# Altium PCB PCB1chinh_thuc_2.PcbDoc
Units mm, origin at the board's own origin, x right, y up, seen from the top; angles counter-clockwise.
Board outline 152.4 x 101.6 mm, 2 copper layers (Top Layer, Bottom Layer); 31 components, 21 nets, 118 pads, 0 vias.
Unrouted connection lines stored in the file: 1.
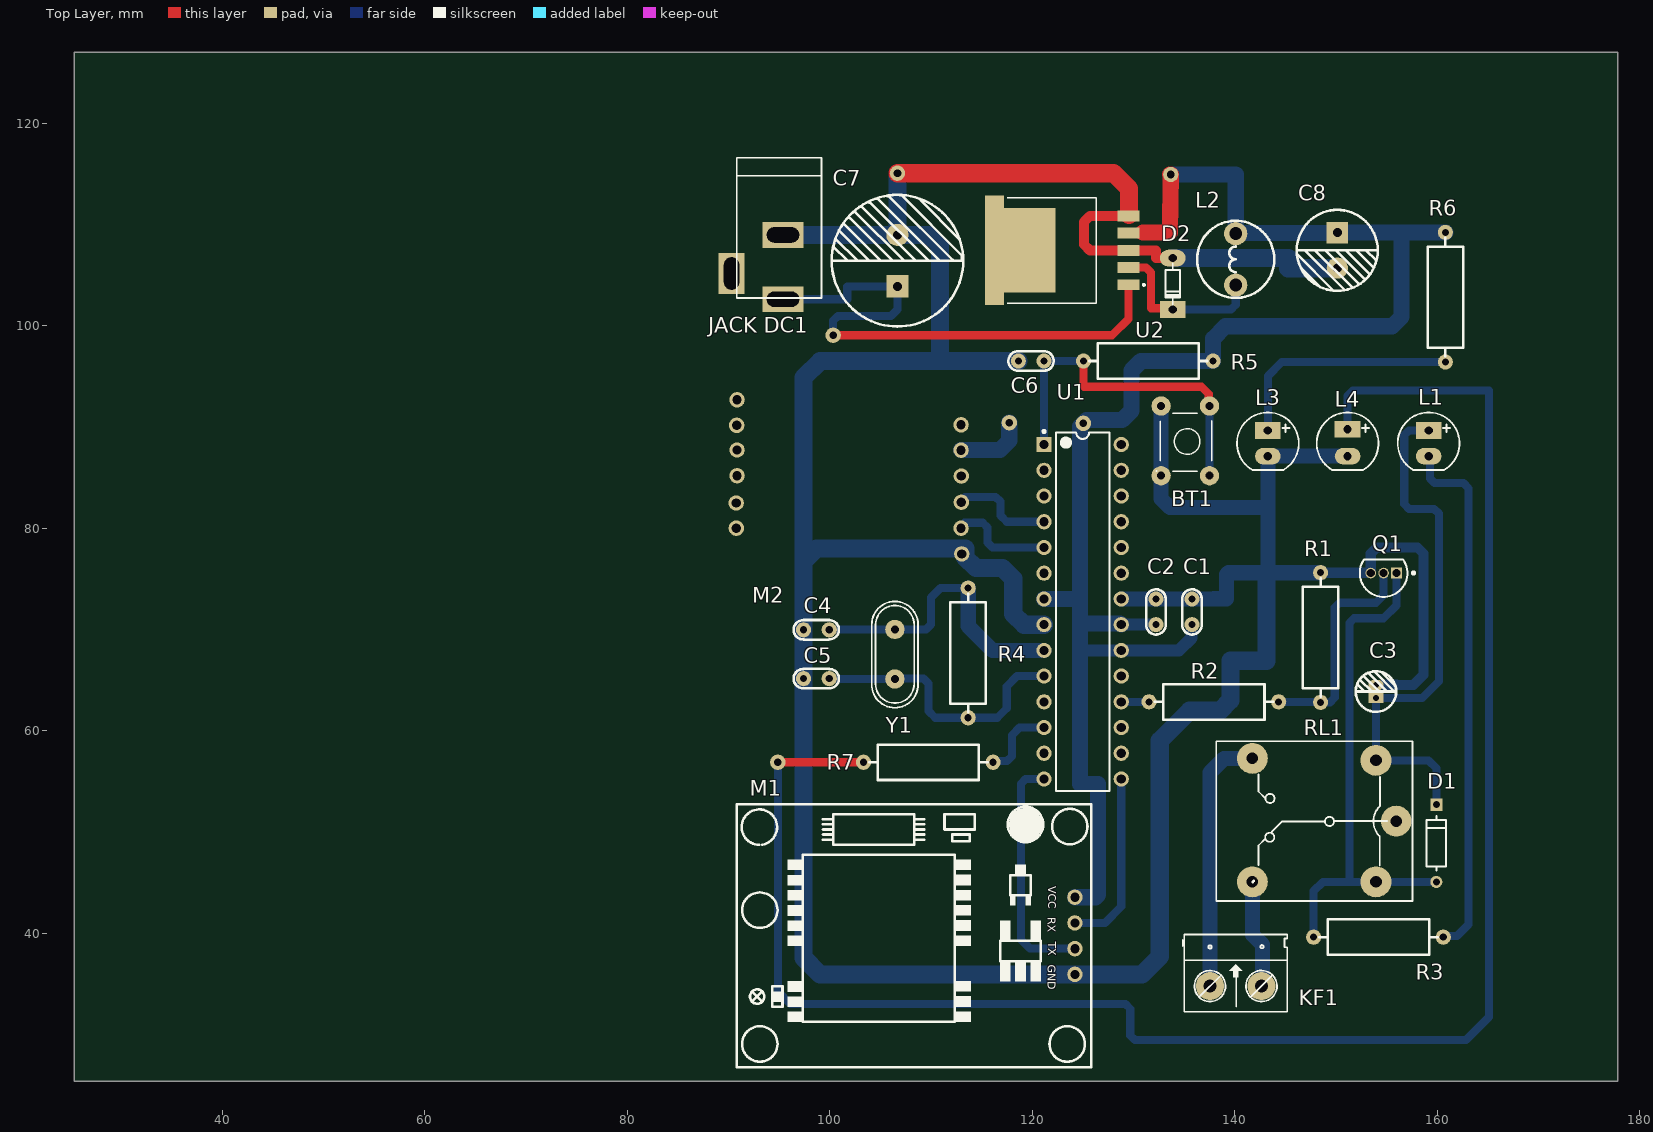
[diagram p0: Top Layer view]
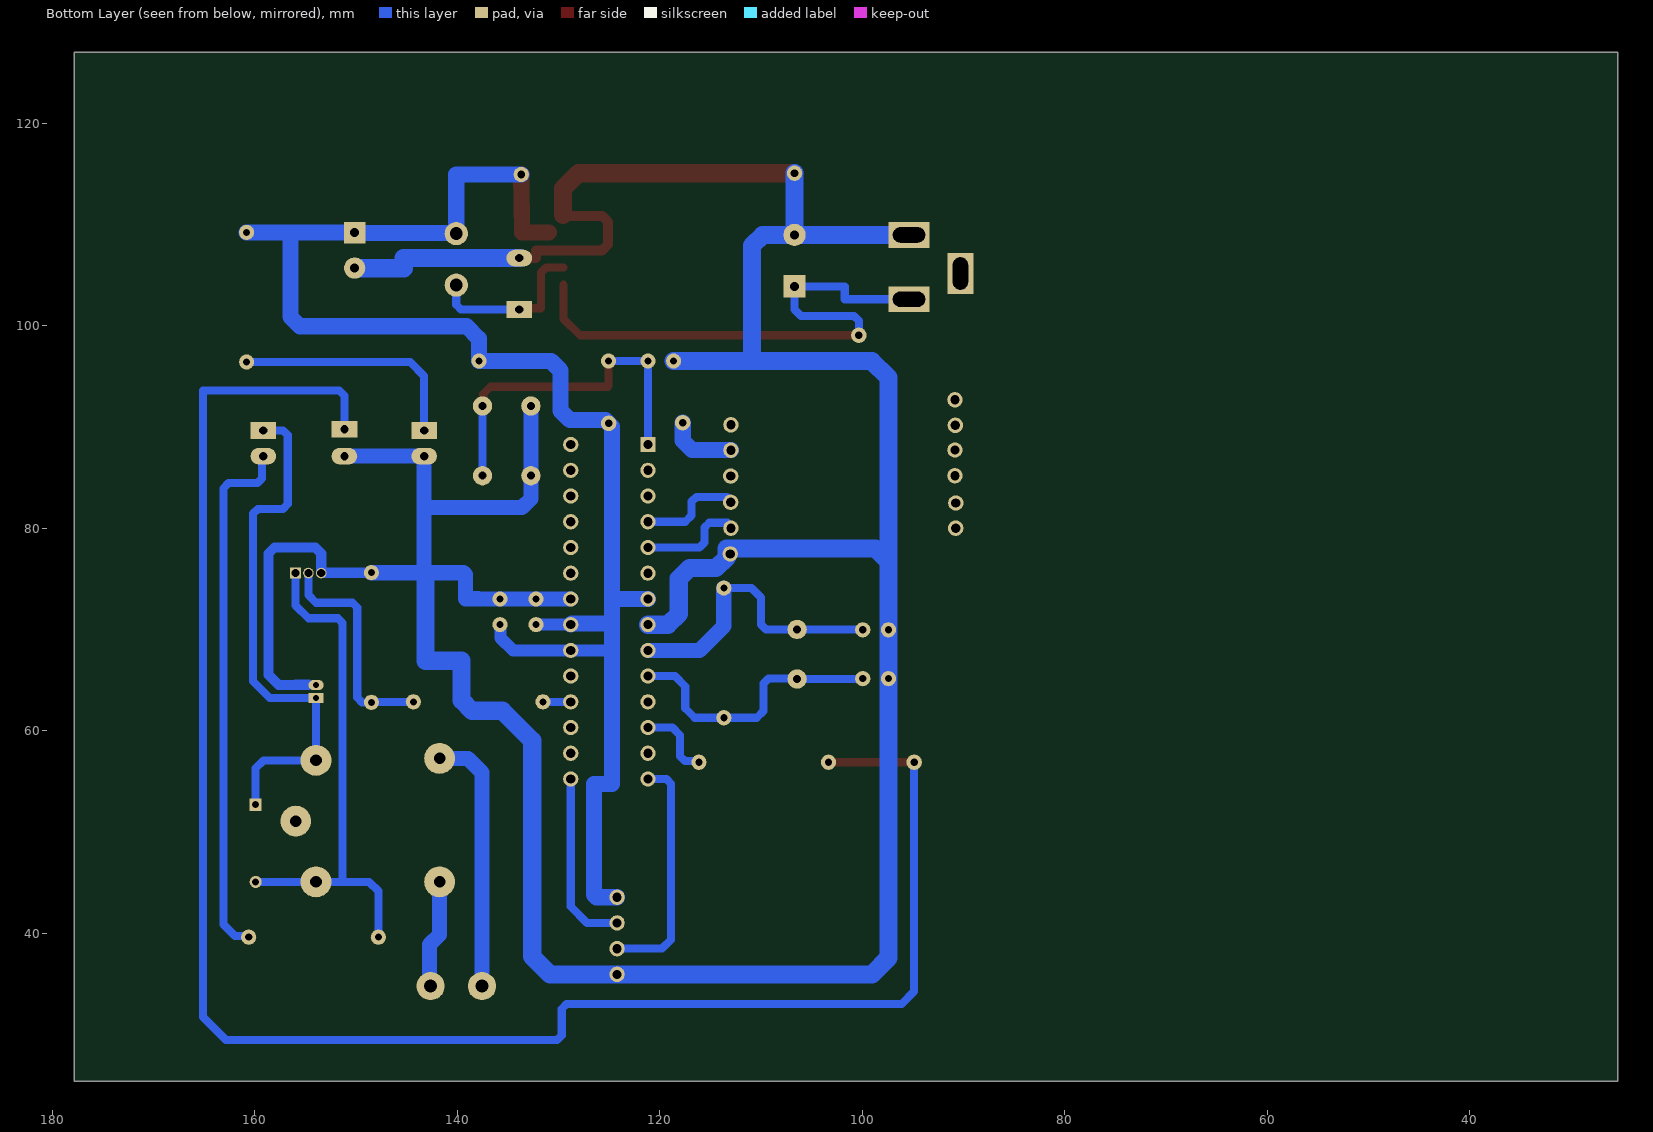
[diagram p1: Bottom Layer view, seen from below]
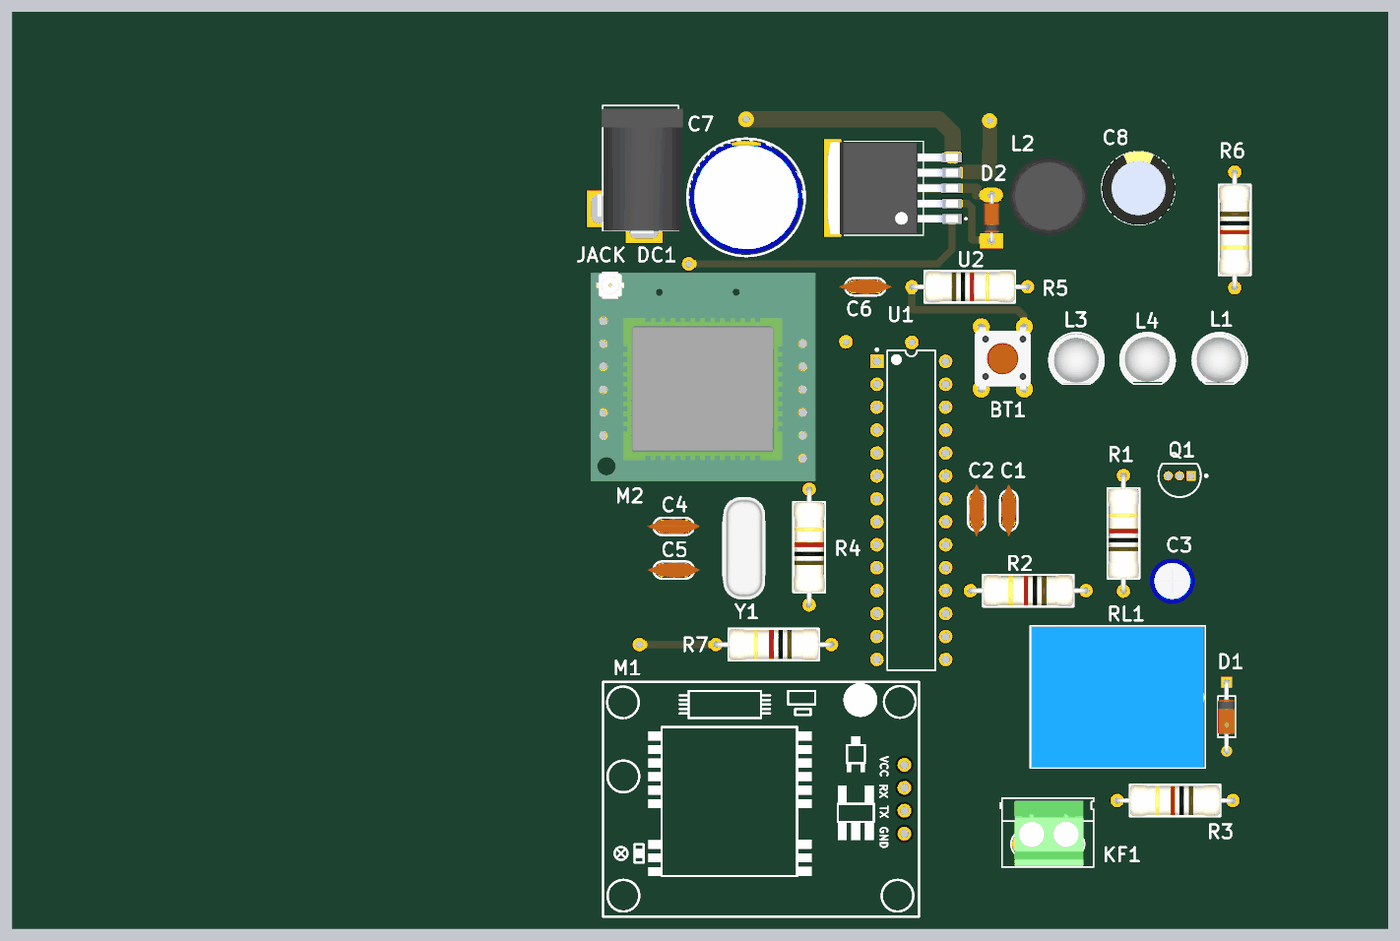
[diagram p2: 3D render of the assembled board from above, using the file's embedded part models]

## Layer stack, top to bottom
Top Solder: solder mask 0.0102, Solder Resist, Dk 3.5
Top Layer: signal copper 0.0356
Dielectric 1: dielectric 0.32, FR-4, Dk 4.8
Bottom Layer: signal copper 0.0356
Bottom Solder: solder mask 0.0102, Solder Resist, Dk 3.5

## Board outline
25.4,25.4 177.8,25.4 177.8,127 25.4,127

## Design rules (kind name [scope] priority, off if disabled: settings)
Clearance [All] p1: gap=0.3 ignorepadtopadclearanceinfootprint=FALSE
PolygonConnect [All] p1: connectstyle=Relief reliefconductorwidth=0.254 reliefentries=4 polygonreliefangle="90 Angle" airgapwidth=0.254
RoutingVias [All] p1: holewidth=0.711 width=1.27 viastyle="Through Hole" minholewidth=0.711 minwidth=1.27 maxholewidth=0.711 maxwidth=1.27
SolderMaskExpansion [All] p1: expansion=0.102 istentingtop=FALSE
SupplyNets "Schematic Supply Nets_1" [InNet('+3.3V')] p1: voltage=0.000
SupplyNets "Schematic Supply Nets" [InNet('GND')] p2: voltage=0.000
Width 3.3V [InNet('+3.3V')] p1: maxlimit=1.6 minlimit=0.5 preferedwidth=1.2
Width GND [InNet('GND')] p2: maxlimit=1.8 minlimit=1 preferedwidth=1.5
Width [All] p3: maxlimit=1.5 minlimit=0.5 preferedwidth=0.8
30 further rules are at their usual default settings.

## Components (designator, comment, footprint, x,y, rotation, side; value= is the part's Value field where it differs from the comment)
BT1 "Nut Nhan 4 Chan Cam 6x6" "Nut Nhan 4 Chan Cam 6x6" 137.693,91.745 r270 top
C1 "104" "tu gom" 135.763,71.755 r90 top
C2 "104" "tu gom" 132.207,71.755 r90 top
C3 "10uF" "tu hoa 4mm" 153.924,63.881 r90 top
C4 "22pF" "tu gom" 98.679,69.977 r0 top
C5 "22pF" "tu gom" 98.679,65.151 r0 top
C6 "104" "tu gom" 119.888,96.52 r0 top
C7 "680uF" "tu hoa 13mm" 106.68,106.426 r90 top
C8 "220uF" "Tu hoa 8mm" 150.114,107.442 r270 top
D1 "1N4148" FP-017AG-MFG 159.893,48.895 r270 top
D2 "1N5824" "DIODE 0.5A" 133.858,104.14 r90 top
"JACK DC1" "JACK DC 5.5" "JACK DC 5.5" 92.837,105.791 r270 top value="Jac DC"
KF1 "CON 2 KF301" "Con 2 KF301 5.08" 137.541,34.798 r0 top
L1 "LED 5mm" LED-5MM-Yellow 159.131,89.662 r270 top
L2 "0912 - 33uH - 2A" "CUON CAM 100uH3A" 140.081,106.553 r90 top
L3 "LED 5mm" LED-5MM-RED 143.256,89.662 r270 top
L4 "LED 5mm" LED-5MM-Green 151.13,89.662 r270 top
M1 "GPS NEO 6M" PCBComponent_1#1 108.331,39.243 r270 top
M2 "SIM A7680C" PCBComponent_1#2 101.765,81.633 r0 top
Q1 "BC547B" ONSC-TO-92-3-29-11 154.682,75.579 r180 top
R1 "10k" "tro vach 1/2w" 148.463,69.215 r90 top
R2 "1k" "tro vach 1/2w" 137.922,62.865 r180 top
R3 "200" "tro vach 1/2w" 154.178,39.624 r180 top
R4 "1M" "tro vach 1/2w" 113.665,67.691 r90 top
R5 "10k" "tro vach 1/2w" 131.445,96.52 r0 top
R6 "1k" "tro vach 1/2w" 160.782,102.82 r270 top
R7 "1k" "tro vach 1/2w" 109.728,56.896 r180 top
RL1 "Relay" "Relay 5 Chan SRD" 155.932,51.085 r180 top
U1 "ATmega328-PU" 28P3 124.968,71.755 r0 top
U2 "LM2596S-3.3" VREG_LM2596S-3.3 122.936,107.442 r180 top
Y1 "16Mhz" "Thach Anh 2 chan cam" 106.426,67.564 r90 top value=4Mhz

## Footprints (in the part's own frame and the unit in brackets; to place one, negate y for a bottom-side part, rotate by r counter-clockwise, add the part's x,y. Pads: shape width x height; smd on the part's side, far side on the other; paste and mask are expansions set on the pad)
28P3 [mm] "28-Pin Plastic Dual In-Line Package (PDIP)"
  rect 1.5x1.5 hole 0.9: 1(-3.81,16.51)
  round 1.5 hole 0.9: 2(-3.81,13.97) 3(-3.81,11.43) 4(-3.81,8.89) 5(-3.81,6.35) 6(-3.81,3.81) 7(-3.81,1.27) 8(-3.81,-1.27) 9(-3.81,-3.81) 10(-3.81,-6.35) 11(-3.81,-8.89) 12(-3.81,-11.43) 13(-3.81,-13.97) 14(-3.81,-16.51) 15(3.81,-16.51) 16(3.81,-13.97) 17(3.81,-11.43) 18(3.81,-8.89) 19(3.81,-6.35) 20(3.81,-3.81) 21(3.81,-1.27) 22(3.81,1.27) 23(3.81,3.81) 24(3.81,6.35) 25(3.81,8.89) 26(3.81,11.43) 27(3.81,13.97) 28(3.81,16.51)
  silkscreen extent -3.93,-17.7 2.65,17.93, body extent -3.6,-17.65 3.6,17.65, height 4.58
"Con 2 KF301 5.08" [mil]
  round 110 hole 50: 1(0,0) 2(200,0)
  silkscreen extent -106,-100 300,200, body extent -45,-97 255,190, height 335
"CUON CAM 100uH3A" [mil] "100uH3A"
  round 90 hole 50: 1(-100,0) 2(100,0)
  silkscreen extent -150,-150 150,150, body extent -171,-175 171,167, height 394
"DIODE 0.5A" [mil] "Diode muoi, xung"
  oval 65x100 hole 32: 1(100,0)
  rect 65x100 hole 32: 2(-100,0)
  silkscreen extent -80,-30 80,28, body extent -108,-33 108,32, height 61
FP-017AG-MFG [mm]
  rect 1.2x1.2 hole 0.7 paste-2539.97 mask+0: 1(-3.813,0)
  round 1.2 hole 0.7 paste-2539.97 mask+0: 2(3.813,0)
  silkscreen extent -2.68,-0.95 2.68,0.95, body extent -4.51,-1.05 4.51,1.05, height 0.25
"JACK DC 5.5" [mm] "Jac DC input"
  rect 2.54x4.064 hole 1.5 slot 3.2 at 90 deg: 1(3.175,2.54) 2(-3.175,2.54)
  rect 4.064x2.54 hole 1.5 slot 3.2 at 0 deg: 3(0.635,-2.54)
  silkscreen extent -10.8,-2.03 3.05,6.35, body extent -10.42,-2.67 3.4,6.84, height 11.02
LED-5MM-Green [mil] "LED 2 PIN, 5 ly , Only colour,pin to pin 100mil"
  rect 65x100 hole 32: 1(-5,0)
  oval 65x100 hole 32: 2(100,0)
  silkscreen extent -70,-120 154,120, body extent -69,-120 145,117, height 339
LED-5MM-RED [mil] "LED 2 PIN, 5 ly , Only colour,pin to pin 100mil"
  rect 65x100 hole 32: 1(0,0)
  oval 65x100 hole 32: 2(100,0)
  silkscreen extent -70,-120 154,120, body extent -65,-119 149,118, height 339
LED-5MM-Yellow [mil] "LED 2 PIN, 5 ly , Only colour,pin to pin 100mil"
  rect 65x100 hole 32: 1(0,0)
  oval 65x100 hole 32: 2(100,0)
  silkscreen extent -70,-120 154,120, body extent -67,-122 147,115, height 339
"Nut Nhan 4 Chan Cam 6x6" [mil] "SW button 4pin, 250 x250 mil"
  round 75 hole 31: 1(-13,-8) 1(258,-8) 2(-13,-196) 2(258,-196)
  silkscreen extent 15,-215 240,0, body extent -31,-225 281,19, height 276
ONSC-TO-92-3-29-11 [mm] "TO, 3-Leads, Body Dia 4.7mm, Pitch 1.27mm"
  rect 1.05x1.05 hole 0.8: 1(-1.27,0)
  round 1.05 hole 0.8: 2(0,0) 3(1.27,0)
  silkscreen extent -3.08,-1.34 2.35,2.35, body extent -2.35,-1.33 2.36,2.36, height 7.87
PCBComponent_1#1 [mil]
  round 60 hole 36 paste-99999 mask+10: 1(-170.37,624.88) 2(-70.37,624.88) 3(29.63,624.88) 4(129.63,624.88)
  silkscreen extent -532,-689 491,689
PCBComponent_1#2 [mil]
  round 60 hole 36 paste-99999 mask+10: 1(-430,435) 2(-431.44,335.84) 3(-430,240) 4(-430,140) 5(-433.54,33.94) 6(-432.84,-63.82) 7(440.9,337.96) 8(440.9,239.49) 9(442.03,138.77) 10(442.03,36.9) 11(440.9,-63.82) 12(443.49,-163.9)
  body extent -485,-262 496,652, height 167
"Relay 5 Chan SRD" [mil] "Relay SPDT, 5 pin, 10A,W 650mil, L 800mil, H 800mil"
  round 120 hole 45: 1(0,0) 2(559.06,236.22) 3(559.06,-243.78) 4(78.74,-236.22) 5(78.74,236.22)
  silkscreen extent -63,-311 700,310, body extent -55,-306 697,304, height 602
"Thach Anh 2 chan cam" [mm]
  round 1.905 hole 0.8: 1(-2.45,0) 2(2.45,0)
  silkscreen extent -5.28,-2.29 5.21,2.29, body extent -5.68,-2.36 5.68,2.29, height 3.5
"tro vach 1/2w" [mm]
  round 1.5 hole 0.7: 1(-6.4,0) 2(6.4,0)
  silkscreen extent -5.84,-1.75 5.84,1.75, body extent -6.62,-1.75 6.62,1.75, height 3.5
"tu gom" [mm] "Tu gom mini"
  round 1.5 hole 0.7: 1(-1.27,0) 2(1.27,0)
  silkscreen extent -2.25,-0.97 2.22,0.97, body extent -2.92,-0.85 2.92,0.85, height 6.12
"tu hoa 4mm" [mm]
  rect 1x1.5 hole 0.6: 1(-0.635,0)
  oval 1x1.5 hole 0.6: 2(0.635,0)
  silkscreen extent -2,-2 2.01,2.01, body extent -2.47,-2.47 2.58,2.58, height 14.81
"Tu hoa 8mm" [mm]
  rect 2.1x2.1 hole 0.9: 1(-1.75,0)
  round 2.1 hole 0.9: 2(1.75,0)
  silkscreen extent -4,-4 4,4, body extent -4.1,-4.07 4.1,4.13, height 13.81
"tu hoa 13mm" [mm]
  rect 2.2x2.2 hole 0.9: 1(-2.54,0)
  round 2.2 hole 0.9: 2(2.54,0)
  silkscreen extent -6.5,-6.5 6.5,6.5, body extent -6.25,-6.25 6.26,6.25, height 23.02
VREG_LM2596S-3.3 [mm]
  rect 2.16x1.07 smd: 1(-6.545,3.4) 2(-6.545,1.7) 3(-6.545,0) 4(-6.545,-1.7) 5(-6.545,-3.4)
  rect 5.08x8.33 smd paste-5: 6(3.175,0)
  rect 1.91x10.8 smd paste-6: 7(6.67,0)
  silkscreen extent -8.18,-5.21 5.4,5.21, body extent -7.18,-5.08 7.18,5.08, height 4.65

## Part data
BT1: "Nut Nhan 4 Chan 6x6mm", Ma_Hang=MH004584, Ten="Nút Nhấn 4 Chân 6x6x5MM DIP"
C1 C2 C6: library part "Tu gom 104 50V", "Cắm", Chung_Loai=Cắm, Don_Vi=Con, Ma_Hang=MH004761, So_Chan=2, Ten_Linh_Kien="Tụ gốm 104 100nF 50V"
C3: library part "Tu Hoa 10uF 25V 4x7", "Cắm", Chung_Loai=Cắm, Don_Vi=Con, Ma_Hang=MH001349, So_Chan=2, Ten_Linh_Kien="Tụ Hóa 10uF 25V 4x7MM"
C4 C5: library part "Tu gom 22pF 50V", "Cắm", Chung_Loai=Cắm, Don_Vi=Con, Ma_Hang=MH004771, So_Chan=2, Ten_Linh_Kien="Tụ gốm 22P 50V"
C7: library part "Tu Hoa 680uF 25V 13x17", "Cắm", Chung_Loai=Cắm, Don_Vi=Con, Ma_Hang=MH005082, So_Chan=2, Ten_Linh_Kien="Tụ Hóa 680uF 25V"
C8: library part "Tu Hoa 220uF 25V 8x10", "Cắm", Chung_Loai=Cắm, Don_Vi=Con, Ma_Hang=MH006864, So_Chan=2, Ten_Linh_Kien="Tụ Hóa 220uF 25V 8x10MM"
D1: library part CMP-07163-000046-1, "DIODE GEN PURP 100V 200MA DO35", Average Rectified Current=200mA, Capacitance=4pF, Case/Package=DO-35, Current=4A, Forward Current=300mA, Forward Voltage=1V, Max Forward Surge Current (Ifsm)=1A, Max Operating Temperature=175°C, Max Power Dissipation=500mW, Max Repetitive Reverse Voltage (Vrrm)=100V, Max Reverse Current=5uA, Min Operating Temperature=-65°C, Package Quantity=2000, Contact Plating=Tin, Current Rating=200mA, Diameter=1.91mm, Element Configuration=Single, Height=4.56mm, Lead Free="Lead Free", Length=4.56mm, Max Reverse Voltage (DC)=100V, Max Surge Current=4A, Mount="Through Hole", Number of Pins=2, Output Current=200mA, Outside Diameter=1.85mm, Packaging=Bulk, Peak Non-Repetitive Surge Current=4A, Polarity=Standard, Power Dissipation=500mW, Radiation Hardening=No, REACH SVHC="No SVHC", Recovery Time=4ns, Reverse Recovery Time=4ns, Reverse Voltage=100V, Series=-, Voltage=100V, Voltage Rating (DC)=100V, Weight=0.01lb, Width=1.91mm
D2: library part "Diode 1N4148", "Cắm", Chung_Loai=Cắm, Don_Vi=Con, Ma_Hang=MH001065, Ten_Linh_Kien="Diode 1N4148 DO35 450mA 100V ( 1N4148 DIP)"
KF1: "Cắm", Chung_Loai=Cắm, Don_Vi=Con, Ma_Hang=MH000987, Ten_Linh_Kien="CON 2 KF301-2P 5.08MM Xanh Dương"
L1: library part "LED 5mm Vang", "Cắm", Chung_Loai=Cắm, Don_Vi=Con, Ma_Hang=MH008968, Ten_Linh_Kien="Led 5MM Phủ Vàng (1000c)"
L2: library part "CUON CAM 470uH DIP", "Cắm", Chung_Loai=Cắm, Don_Vi=Con, Ma_Hang=MH002232, Ten_Linh_Kien="Cuộn Cảm 470uH 3A 8x10MM"
L3: library part "LED 5mm Do", "Cắm", Chung_Loai=Cắm, Don_Vi=Con, Ma_Hang=MH008967, Ten_Linh_Kien="Led 5MM Phủ Đỏ (1000c)"
L4: library part "LED 5mm Xanh La", "Cắm", Chung_Loai=Cắm, Don_Vi=Con, Ma_Hang=MH008969, Ten_Linh_Kien="LED 5MM Phủ Xanh (1000c)"
Q1: library part CMP-1048-01467-1, "Amplifier Transistor, NPN Silicon, 3-Pin TO-92, Bulk Box", Manufacturer="On Semiconductor", ComponentLink1Description="Manufacturer URL", ComponentLink1URL=http://www.onsemi.com/, ComponentLink2Description=Datasheet, ComponentLink2URL=http://www.onsemi.com/pub_link/Collateral/BC546-D.PDF, ComponentLink3Description="Package Specification", ComponentLink3URL=http://www.onsemi.cn/pub_link/Collateral/2N6426-D.PDF, DatasheetVersion="Rev. 7", fT Min (MHz)=150, IC Continuous (A)=0.1, Mounting Technology="Through Hole", PackageDescription="3-Pin Transistor Outline, Body 4.825 x 3.685 mm, Pitch 1.27 mm", PackageReference=TO-92-3-29-11_AM_SL, PackageVersion="Rev. AM", Packing="Bulk Box", PartNumber=BC547B, Polarity=NPN, RoHS=FALSE
R1 R5: library part "Tro Vach 1/2W 5% 10k", "Cắm", Chung_Loai=Cắm, Don_Vi=Con, Ma_Hang=MH006206, So_Chan=2, Ten_Linh_Kien="Trở 5% 1/2w 10k"
R2 R6 R7: library part "Tro Vach 1/2W 5% 1k", "Cắm", Chung_Loai=Cắm, Don_Vi=Con, Ma_Hang=MH007240, So_Chan=2, Ten_Linh_Kien="Trở 5% 1/2w 1K"
R3: library part "Tro Vach 1/2W 5% 150R", "Cắm", Chung_Loai=Cắm, Don_Vi=Con, Ma_Hang=MH007244, So_Chan=2, Ten_Linh_Kien="Trở 5% 1/2w 150R"
R4: library part "Tro Vach 1/2W 5% 1M", "Cắm", Chung_Loai=Cắm, Don_Vi=Con, Ma_Hang=MH007242, So_Chan=2, Ten_Linh_Kien="Trở 5% 1/2w 1M"
RL1: library part "Relay 5 Chan SRD", "Relay 5 Chan", Ma_Hang=MH009374, Ten="Relay 5V10A SRD-05VDC-SL-C Chính Hãng"
U1: library part CMP-0095-00015-2, "8-bit AVR Microcontroller, 32KB Flash, 1KB EEPROM, 2KB SRAM, 28-pin PDIP, Industrial Grade (-40°C to 85°C)", ComponentLink1Description="Manufacturer URL", ComponentLink1URL=http://www.atmel.com/, ComponentLink2Description="ATmega48A/48PA/88A/88PA/168A/168PA/328/328P Datasheet", ComponentLink2URL=http://www.atmel.com/dyn/resources/prod_documents/8271.pdf, ComponentLink3Description="ATmega48A/48PA/88A/88PA/168A/168PA/328/328P Summary", ComponentLink3URL=http://www.atmel.com/dyn/resources/prod_documents/8271S.pdf, DatasheetVersion="revD, May-2011", PackageDescription="28-lead (0.300\"/7.62mm Wide) Plastic Dual Inline Package (PDIP)", PackageReference=28P3, PackageVersion="revB, Sep-2001", RevisionNote="DatasheetVersion updated. URLs added."
U2: "SIMPLE SWITCHER&reg; 4.5V to 40V, 3A Low Component Count Step-Down Regulator 5-DDPAK/TO-263", Package="TO-263-5 Texas Instruments", Availability="In Stock", Check_prices=https://www.snapeda.com/parts/LM2596S-3.3/Texas+Instruments/view-part/?ref=eda, MF="Texas Instruments", MP=LM2596S-3.3, Price=None, Purchase-URL=https://pricing.snapeda.com/search/part/LM2596S-3.3/?ref=eda, SnapEDA_Link=https://www.snapeda.com/parts/LM2596S-3.3/Texas+Instruments/view-part/?ref=snap
Y1: library part "Thach Anh 2 chan Cam", "Crystal For all Crystal 2pin."
M1: ComponentLink1Description="New link"

## Free pads (board coordinates)
  round 1.524 hole 0.762: 2(94.869,56.896) 3(117.729,90.424) 4(125.031,90.361) 6(106.68,115.062) 12(133.667,114.935) 13(100.33,99.06)

## Nets (pads, with @x,y where several pads share a name; then routed paths per layer and width w, separated by ;. In a path a pad name is that pad's centre, name@x,y a point inside that pad or via, vN(x,y) a via of type N, cw(c..) or ccw(c..) an arc to the next point about the centre after c; other vN are vias at no path point)
328P_16MHZ_XTAL1: C4.2 R4.2 U1.9 Y1.2 | length 29.2
  Bottom Layer w0.8: C4.2 99.967,69.995 106.408,69.995 Y1.2 109.513,70.014 109.982,70.483 109.982,73.152 110.921,74.091 R4.2
  Bottom Layer w1.5: R4.2 113.665,70.358 116.078,67.945 U1.9
328P_16MHZ_XTAL2: C5.2 R4.1 U1.10 Y1.1 | length 27.4
  Bottom Layer w0.8: C5.2 99.967,65.133 106.408,65.133 Y1.1 106.463,65.151 109.259,65.151 109.728,64.682 109.728,61.976 110.413,61.291 R4.1 116.536,61.291 117.475,62.23 117.475,64.389 118.491,65.405 U1.10
328P_PB0: M1.3 U1.14 | length 23.6
  Bottom Layer w0.8: U1.14 119.341,55.245 118.872,54.776 118.872,39.37 119.752,38.49 M1.3
328P_PB1: M1.2 U1.15 | length 17.8
  Bottom Layer w0.8: M1.2 127.16,41.03 128.778,42.649 U1.15
328P_PB4_MISO: R2.2 U1.18 | length 2.7
  Bottom Layer w0.8: U1.18 R2.2
328P_PC6_RST: BT1.1 C6.2 R5.1 U1.1 | length 35.7
  Top Layer w0.8: R5.1@125.179,96.386 R5.1 125.045,94.03 125.095,93.98 136.691,93.98 137.414,93.257 137.414,92.202 137.541,92.075 BT1.1@137.49,92.075
  Bottom Layer w0.8: U1.1 C6.2 R5.1 ; BT1.1@137.49,85.192 BT1.1@137.49,92.075
328P_PD2: M2.10 U1.4 | length 9.6
  Bottom Layer w0.8: M2.10@113.336,83.106 116.371,83.106 116.84,82.638 116.84,81.28 117.475,80.645 U1.4
328P_PD3: M2.11 U1.5 | length 9.7
  Bottom Layer w0.8: M2.11@113.307,80.548 115.101,80.548 115.57,80.079 115.57,78.613 116.078,78.105 U1.5
328P_PD6: R7.1 U1.12 | length 7.7
  Bottom Layer w0.8: R7.1 116.255,57.023 117.514,57.023 117.983,57.492 117.983,59.563 118.745,60.325 U1.12
+3.3V: C1.1 C2.1 C8.1 L2.2 M1.1 M2.8 pad.3 pad.4 pad.12 R5.2 R6.1 U1.7 U1.20 U1.21 U2.4 | length 170.9
  Top Layer w1.6: 130.937,109.22 133.604,109.22 pad.12 pad.12@133.604,114.935
  Bottom Layer w1.2: 124.714,67.901 124.758,67.945 U1.20 134.493,67.945 135.706,69.158 135.706,70.428 C1.1 ; U1.21 C2.1
  Bottom Layer w1.6: M2.8 116.792,87.716 117.729,88.653 pad.3 ; U1.7 124.714,73.025 ; M1.1 126.247,43.57 126.492,43.815 126.492,54.737 124.714,54.737 124.714,67.901 124.714,70.612 ; U1.21 128.651,70.612 124.714,70.612 ; pad.12 140.081,114.935 L2.2 140.13,109.142 150.065,109.142 C8.1 156.464,109.192 ; R6.1 160.754,109.192 156.464,109.192 ; 124.714,70.612 124.714,73.025 ; 124.714,73.025 124.714,90.043 pad.4 125.349,90.678 128.857,90.678 129.794,91.615 129.794,95.583 130.731,96.52 R5.2 137.845,98.729 139.065,99.949 155.527,99.949 156.464,100.886 156.464,109.192
GND: "JACK DC1.2" BT1.2 C1.2 C2.2 C3.2 C4.1 C5.1 C6.1 C7.2 C8.2 D2.1 L3.2 L4.2 M1.4 M2.12 pad.6 Q1.3 R1.2 U1.8 U1.22 U2.3 U2.5 | length 374.7
  Top Layer w1: U2.5 125.681,110.842 125.095,110.256 125.095,108.028 125.681,107.442 U2.3 132.207,107.442 132.207,106.68 D2.1
  Top Layer w1.8: pad.6 128.016,115.062 129.54,113.538 U2.5@129.54,110.936
  Bottom Layer w1: R1.2 Q1.3@153.28,75.615 ; Q1.3 153.412,77.519 153.998,78.105 158.037,78.105 158.623,77.519 158.623,65.532 157.607,64.516 155.971,64.516 155.941,64.546 154.686,64.546
  Bottom Layer w1.5: U1.22 C2.2 C1.2 137.932,73.025 137.941,73.034 139.183,73.034 139.183,75.429 139.369,75.615 143.256,75.615 ; BT1.2@132.715,92.075 132.715,85.192 132.715,82.921 133.594,82.042 143.129,82.042 143.256,82.169 ; R1.2 143.256,75.615 ; L4.2 L3.2 143.256,82.169 ; 143.256,75.615 143.256,82.169
  Bottom Layer w1.8: 95.377,108.966 C7.2 ; pad.6 C7.2 ; C6.1 110.871,96.52 ; U1.8 119.164,70.485 118.11,71.539 118.11,75.019 117.056,76.073 114.427,76.073 113.373,77.127 113.373,78.006 98.707,78.006 97.409,76.708 ; D2.1 145.273,106.68 ; 143.256,75.615 143.129,75.488 143.129,66.929 139.573,66.929 139.573,63.03 138.519,61.976 135.509,61.976 132.588,59.055 132.588,37.719 130.819,35.95 M1.4 99.051,35.95 97.409,37.592 C5.1 C4.1 97.409,76.708 ; 145.273,105.665 150.087,105.665 C8.2 ; 97.409,76.708 97.409,94.869 99.06,96.52 110.871,96.52 ; C7.2 109.817,108.966 110.871,107.912 110.871,96.52
NetC3_1: C3.1 D1.1 L1.1 RL1.4 | length 52.9
  Bottom Layer w0.8: L1.1 159.131,89.535 159.004,89.662 157.187,89.662 156.718,89.193 156.718,82.384 157.187,81.915 159.678,81.915 160.147,81.446 160.147,64.897 158.496,63.246 C3.1 153.928,63.242 153.928,57.089 RL1.4 159.108,57.085 159.893,56.3 D1.1
NetC7_1: "JACK DC1.1" C7.1 pad.13 U2.1 | length 56.3
  Top Layer w0.8: pad.13 127.869,99.06 129.481,100.672 U2.1
  Bottom Layer w0.8: 95.377,102.616 101.727,102.616 101.727,103.886 C7.1@106.572,103.886 ; pad.13 100.33,100.496 100.799,100.965 106.045,100.965 106.68,101.6 C7.1
  Bottom Layer w1.5: C7.1@106.572,103.886 C7.1
NetD1_2: D1.2 Q1.1 R3.2 RL1.5 | length 51.2
  Bottom Layer w0.8: R3.2 147.778,44.179 148.684,45.085 151.308,45.085 ; Q1.1 155.952,72.386 154.686,71.12 151.777,71.12 151.308,70.651 151.308,45.085 ; D1.2 159.891,45.084 153.933,45.084 RL1.5 151.308,45.085
NetD2_2: D2.2 L2.1 U2.2 | length 16.5
  Top Layer w0.8: U2.2 131.23,105.742 131.699,105.273 131.699,101.727 133.731,101.727 D2.2
  Bottom Layer w0.8: D2.2 139.612,101.6 140.081,102.069 L2.1
NetKF1_1: KF1.1 RL1.3 | length 25.9
  Bottom Layer w1.5: KF1.1 137.541,55.89 138.928,57.277 RL1.3
NetKF1_2: KF1.2 RL1.2 | length 10.7
  Bottom Layer w1.5: RL1.2 141.732,39.868 142.712,38.888 142.712,34.889 KF1.2
NetL1_2: L1.2 R3.1 | length 52.5
  Bottom Layer w0.8: L1.2 159.258,86.995 159.258,84.924 159.727,84.455 162.56,84.455 163.068,83.947 163.068,40.894 161.932,39.758 160.712,39.758 R3.1
NetL3_1: L3.1 R6.2 | length 23.5
  Bottom Layer w0.8: L3.1 143.256,95.05 144.626,96.42 R6.2
NetL4_1: L4.1 pad.2 R7.2 | length 185.1
  Top Layer w0.8: pad.2 R7.2
  Bottom Layer w0.8: pad.2 94.869,34.251 96.1,33.02 129.198,33.02 129.667,32.551 129.667,29.933 130.136,29.464 162.814,29.464 165.1,31.75 165.1,93.599 151.638,93.599 151.13,93.091 L4.1
NetQ1_2: Q1.2 R1.1 R2.1 | length 22.2
  Bottom Layer w0.8: R2.1 144.347,62.84 148.438,62.84 R1.1 149.391,62.815 149.86,63.284 149.86,72.175 150.329,72.644 153.924,72.644 154.682,73.402 Q1.2
pads on no net: "JACK DC1.3" M2.1 M2.2 M2.3 M2.4 M2.5 M2.6 M2.7 M2.9 RL1.1 U1.2 U1.3 U1.6 U1.11 U1.13 U1.16 U1.17 U1.19 U1.23 U1.24 U1.25 U1.26 U1.27 U1.28 U2.6 U2.7

## Text inside footprints (layer, text, board x,y; h text height)
M1: Top Overlay "GND" at 121.532,36.884 h0.8 r270; Top Overlay "TX" at 121.553,39.185 h0.8 r270; Top Overlay "RX" at 121.503,41.585 h0.8 r270; Top Overlay "VCC" at 121.558,44.659 h0.8 r270